# Altium PCB Rambo_Panel.PcbDoc
Units mil, origin at the board's own origin, x right, y up, seen from the top; angles counter-clockwise.
Board outline 4606.1 x 8609.74 mil, 4 copper layers (Top, GND, Supply, Bottom), stack 59.2 mil thick; 8 components, 0 nets, 12 pads, 0 vias.
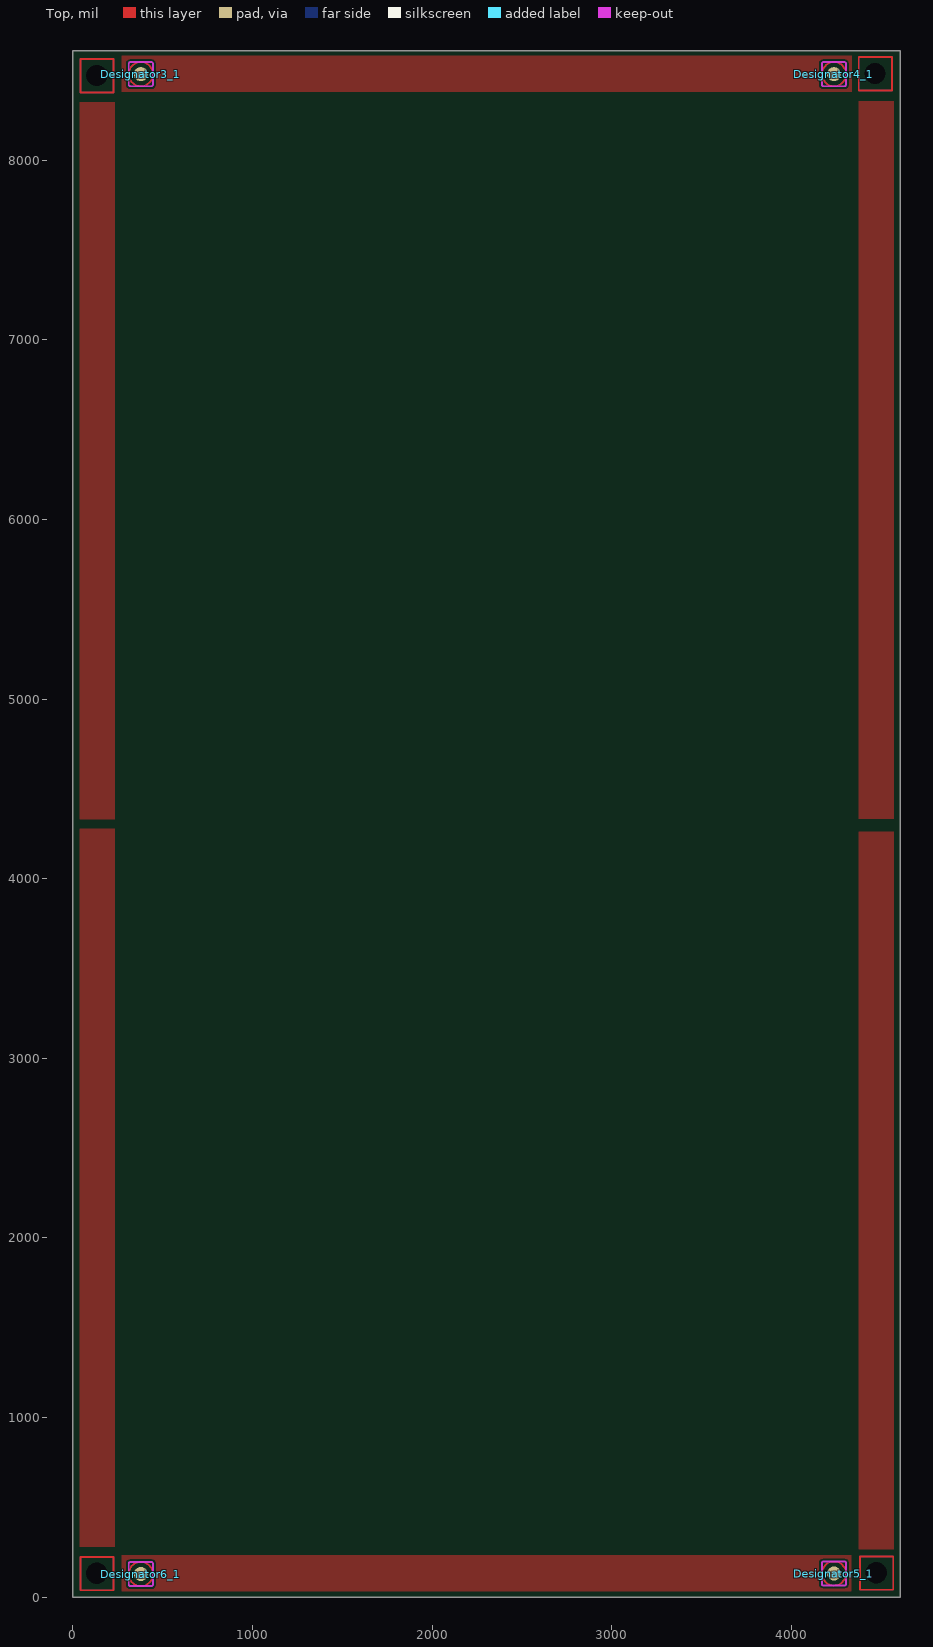
[diagram p0: Top view]
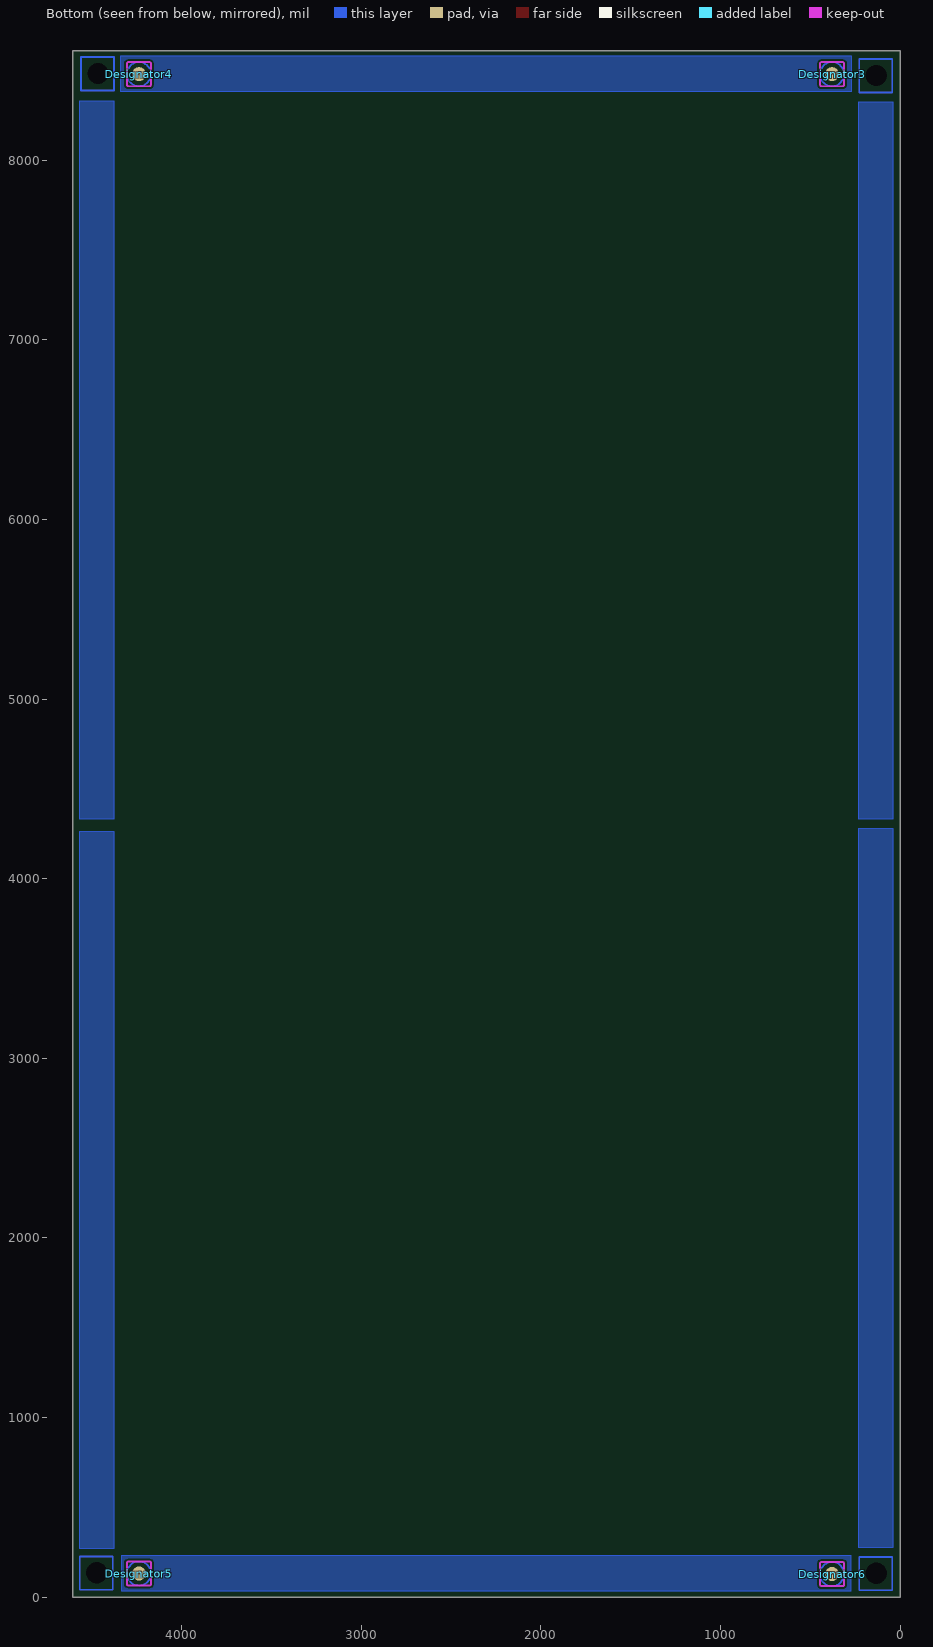
[diagram p1: Bottom view, seen from below]
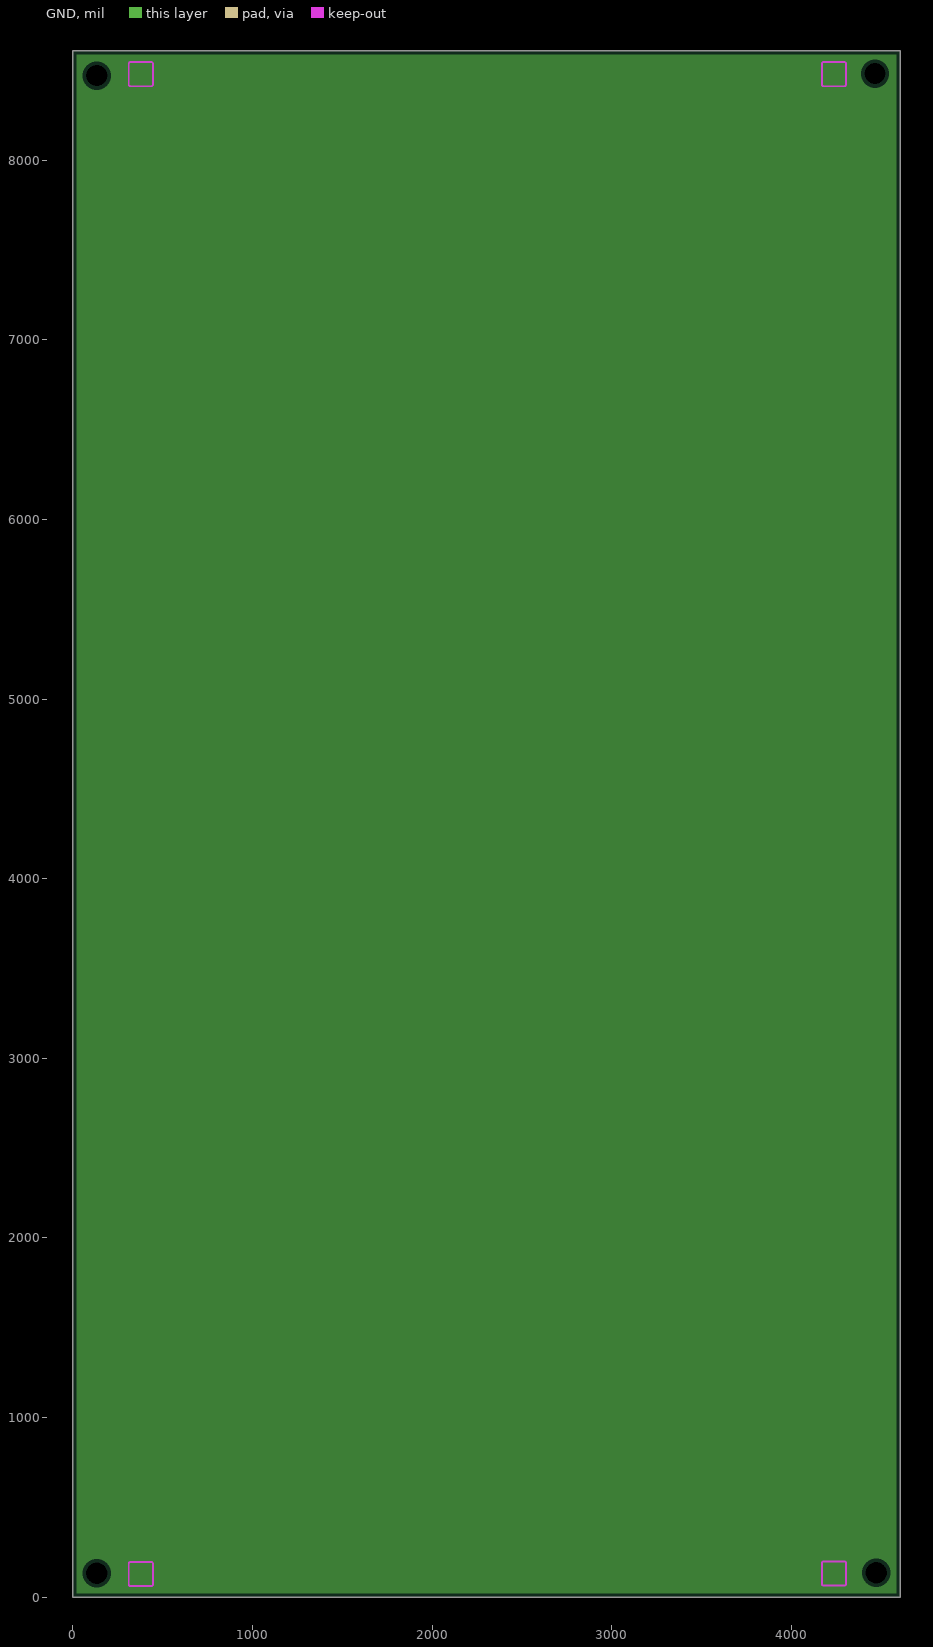
[diagram p2: GND, clearances drawn from the general rule]
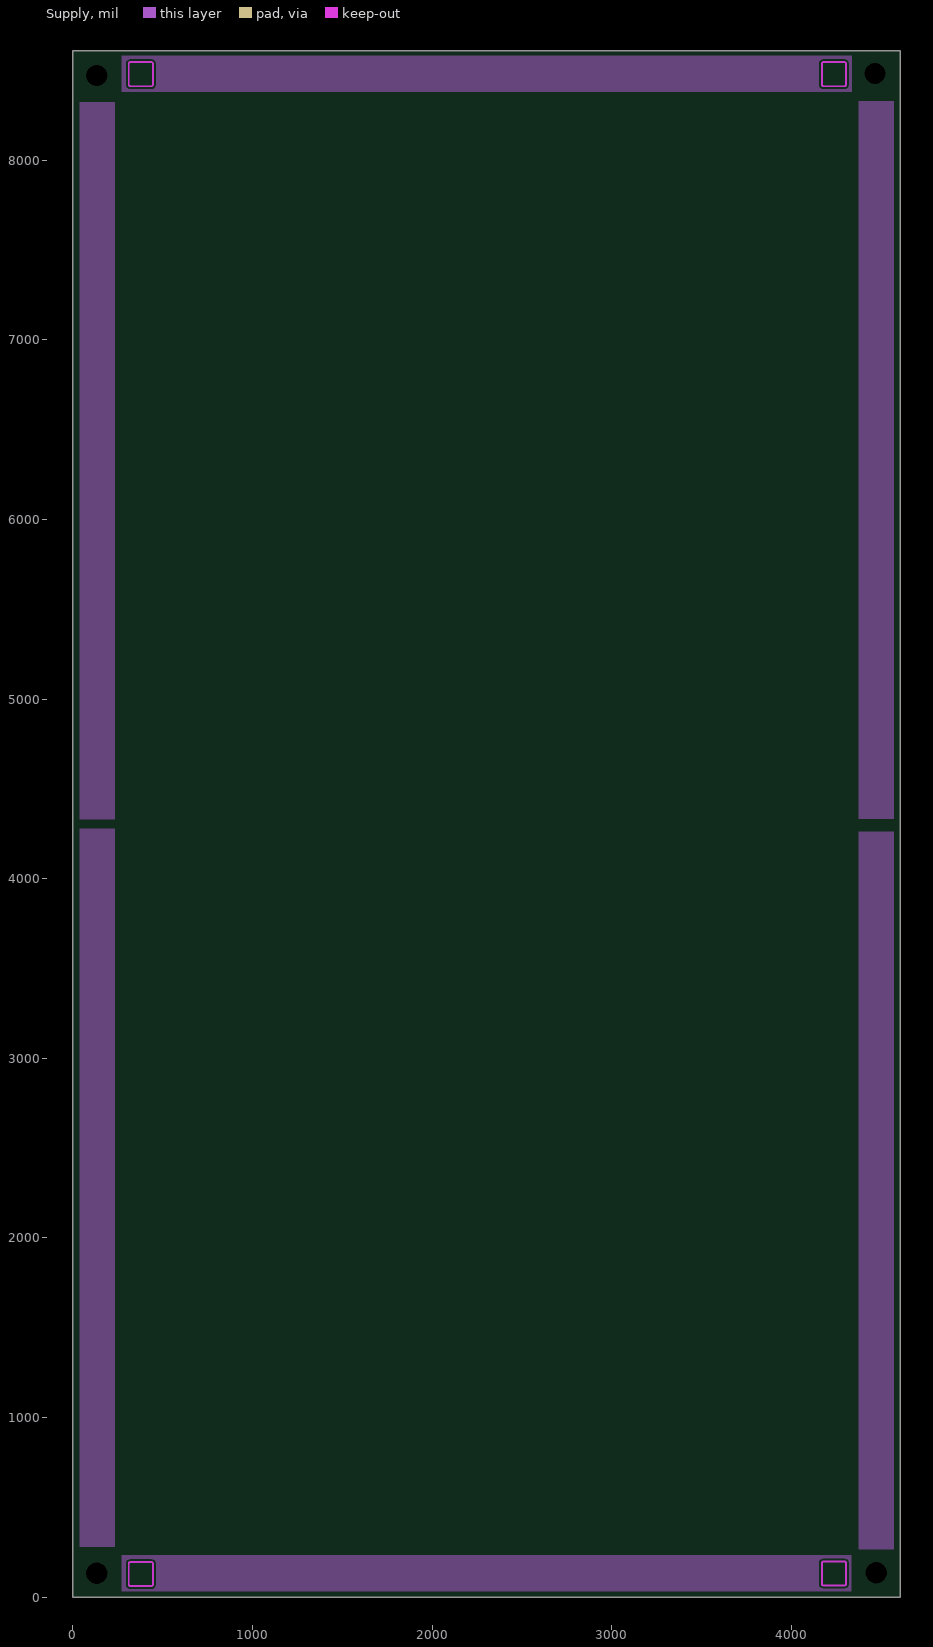
[diagram p3: Supply]

## Layer stack, top to bottom
Top Solder: solder mask 0.4, Solder Resist, Dk 3.5
Top: signal copper 2.8
Dielectric 1: prepreg 5.4, FR-4, Dk 4.2
GND: plane copper 1.4
Dielectric 2: core 40, FR-4, Dk 4.2
Supply: signal copper 1.4
Dielectric 3: prepreg 5.4, FR-4, Dk 4.2
Bottom: signal copper 2.8
Bottom Solder: solder mask 0.4, Solder Resist, Dk 3.5

## Board outline
0,0 0,8609.74 4606.1,8609.74 4606.1,0

## Design rules (kind name [scope] priority, off if disabled: settings)
Clearance [All] p1: gap=10 ignorepadtopadclearanceinfootprint=FALSE except(0: Arc-Hole Track-Hole SMDPad-Hole THPad-Hole Via-Hole Fill-Hole Poly-Hole Region-Hole Text-Hole)
HoleSize [All] p1: absolutevalues=TRUE maxlimit=120 minlimit=1 maxpercent=80.000 minpercent=20.000
PlaneClearance [All] p1: clearance=20
PlaneConnect [All] p1: planeconnectstyle=Relief reliefexpansion=20 reliefentries=4 reliefconductorwidth=10 reliefairgap=10
PolygonConnect [All] p1: connectstyle=Relief reliefconductorwidth=10 reliefentries=4 polygonreliefangle="90 Angle" airgapwidth=10
RoutingVias [All] p1: holewidth=28 width=50 viastyle="Through Hole" minholewidth=28 minwidth=50 maxholewidth=28 maxwidth=50
SolderMaskExpansion [All] p1: expansion=4
Width [All] p1: maxlimit=10 minlimit=7 preferedwidth=10 midlayer1_minwidth=10 minimp=50.000000 maximp=50.000000 favimp=50.000000
27 further rules are at their usual default settings.

## Components (designator, comment, footprint, x,y, rotation, side; value= is the part's Value field where it differs from the comment)
Designator3 "Comment" FIDUCIAL-2X3-PANEL 378.94,8479.74 r90 bottom
Designator3_1 "Comment" FIDUCIAL-2X3-PANEL 378.94,8479.74 r90 top
Designator4 "Comment" FIDUCIAL-2X3-PANEL 4237.8,8479.74 r90 bottom
Designator4_1 "Comment" FIDUCIAL-2X3-PANEL 4237.8,8479.74 r90 top
Designator5 "Comment" FIDUCIAL-2X3-PANEL 4237.8,131.89 r90 bottom
Designator5_1 "Comment" FIDUCIAL-2X3-PANEL 4237.8,131.89 r90 top
Designator6 "Comment" FIDUCIAL-2X3-PANEL 378.94,128.94 r90 bottom
Designator6_1 "Comment" FIDUCIAL-2X3-PANEL 378.94,128.94 r90 top

## Footprints (in the part's own frame and the unit in brackets; to place one, negate y for a bottom-side part, rotate by r counter-clockwise, add the part's x,y. Pads: shape width x height; smd on the part's side, far side on the other; paste and mask are expansions set on the pad)
FIDUCIAL-2X3-PANEL [mm]
  rrect100% 2x2 smd paste+0 mask+0.508: 1(0,0)
  Top circle w0.178: c0,0 r1.7
  Keep-Out Layer region: -1.5,-1.7 -1.577,-1.685 -1.641,-1.641 -1.685,-1.577 -1.7,-1.5 -1.7,-1.5 -1.7,1.5 -1.685,1.577 -1.641,1.641 -1.577,1.685 -1.5,1.7 -1.5,1.7 1.5,1.7 1.577,1.685 1.641,1.641 1.685,1.577 1.7,1.5 1.7,1.5 1.7,-1.5 1.685,-1.577 1.641,-1.641 1.577,-1.685 1.5,-1.7 1.5,-1.7
  Keep-Out Layer lines w0.254: -1.5,-1.7 cw(c-1.5,-1.5) -1.7,-1.5 -1.7,1.5 cw(c-1.5,1.5) -1.5,1.7 1.5,1.7 cw(c1.5,1.5) 1.7,1.5 1.7,-1.5 cw(c1.5,-1.5) 1.5,-1.7 -1.5,-1.7
  body extent -1.02,-1.02 1.02,1.02, height 0.02

## Free pads (board coordinates)
  round 0 hole 118.11 unplated paste-3897.64 mask-4.02: 0(132.87,132.87) 1(4473.19,135.83) 2(4466.1,8482.83) 3(132.87,8471.75)

## Nets (pads, with @x,y where several pads share a name; then routed paths per layer and width w, separated by ;. In a path a pad name is that pad's centre, name@x,y a point inside that pad or via, vN(x,y) a via of type N, cw(c..) or ccw(c..) an arc to the next point about the centre after c; other vN are vias at no path point)
pads on no net: Designator3.1 Designator3_1.1 Designator4.1 Designator4_1.1 Designator5.1 Designator5_1.1 Designator6.1 Designator6_1.1
copper on no net: | length 5922.1
  Top w10: 43.31,38.39 227.36,38.39 227.36,224.41 43.31,224.41 43.31,38.39 ; 43.31,8377.26 43.31,8563.28 227.36,8563.28 227.36,8377.26 43.31,8377.26 ; 4376.1,8388.35 4560.59,8388.35 4560.59,8574.37 4376.1,8574.37 4376.1,8388.35 ; 4383.62,41.34 4567.68,41.34 4567.68,227.36 4383.62,227.36 4383.62,41.34
  Bottom w10: 43.31,38.39 227.36,38.39 227.36,224.41 43.31,224.41 43.31,38.39 ; 43.31,8377.26 227.36,8377.26 227.36,8563.28 43.31,8563.28 43.31,8377.26 ; 4376.53,8388.35 4560.59,8388.35 4560.59,8574.37 4376.53,8574.37 4376.53,8388.35 ; 4383.62,41.34 4383.62,227.36 4567.68,227.36 4567.68,41.34 4383.62,41.34

## Polygon pours and split planes (outlines as drawn)
no net on Top "Frame-Copper" (solid, pour order 61): 4570,8327.83 4570,4332.83 4376.1,4332.83 4376.1,8327.83
no net on Top "Frame-Copper" (solid, pour order 59): 4570,4262.83 4570,267.83 4376.1,267.83 4376.1,4262.83
no net on Top "Frame-Copper" (solid, pour order 57): 232.83,4277.83 232.83,279.56 38.94,279.56 38.94,4277.83
no net on Top "Frame-Copper" (solid, pour order 55): 271.36,8382.44 4337.83,8382.44 4337.83,8582.24 271.36,8582.24
no net on Top "Frame-Copper" (solid, pour order 53): 273.62,33.46 4332.83,33.46 4332.83,233.27 273.62,233.27
no net on Top "Frame-Copper" (solid, pour order 51): 232.78,8322.83 232.78,4331.83 38.89,4331.83 38.89,8322.83
no net on Bottom "Frame-Copper" (solid, pour order 97): 273.62,33.46 4332.83,33.46 4332.83,233.27 273.62,233.27
no net on Bottom "Frame-Copper" (solid, pour order 95): 232.83,4277.83 232.83,277.56 38.94,277.56 38.94,4277.83
no net on Bottom "Frame-Copper" (solid, pour order 93): 232.83,8322.83 232.83,4332.83 38.94,4332.83 38.94,8322.83
no net on Bottom "Frame-Copper" (solid, pour order 91): 271.21,8381.5 4337.83,8381.5 4337.83,8581.3 271.21,8581.3
no net on Bottom "Frame-Copper" (solid, pour order 89): 4570,8327.83 4570,4332.83 4376.1,4332.83 4376.1,8327.83
no net on Bottom "Frame-Copper" (solid, pour order 87): 4570,4262.83 4570,271.83 4376.1,271.83 4376.1,4262.83
no net on Bottom "Frame-Copper" (solid, pour order 73): 4570,4262.83 4570,271.83 4376.1,271.83 4376.1,4262.83
no net on Bottom "Frame-Copper" (solid, pour order 71): 4570,8327.83 4570,4332.83 4376.1,4332.83 4376.1,8327.83
no net on Bottom "Frame-Copper" (solid, pour order 69): 271.21,8381.5 4337.83,8381.5 4337.83,8581.3 271.21,8581.3
no net on Bottom "Frame-Copper" (solid, pour order 67): 232.83,8322.83 232.83,4332.83 38.94,4332.83 38.94,8322.83
no net on Bottom "Frame-Copper" (solid, pour order 65): 232.83,4277.83 232.83,277.56 38.94,277.56 38.94,4277.83
no net on Bottom "Frame-Copper" (solid, pour order 63): 273.62,33.46 4332.83,33.46 4332.83,233.27 273.62,233.27
no net on Supply "Frame-Copper" (solid, pour order 109): 232.78,8322.83 232.78,4331.83 38.89,4331.83 38.89,8322.83
no net on Supply "Frame-Copper" (solid, pour order 107): 273.62,33.46 4332.83,33.46 4332.83,233.27 273.62,233.27
no net on Supply "Frame-Copper" (solid, pour order 105): 271.36,8382.44 4337.83,8382.44 4337.83,8582.24 271.36,8582.24
no net on Supply "Frame-Copper" (solid, pour order 103): 232.83,4277.83 232.83,279.56 38.94,279.56 38.94,4277.83
no net on Supply "Frame-Copper" (solid, pour order 101): 4570,4262.83 4570,267.83 4376.1,267.83 4376.1,4262.83
no net on Supply "Frame-Copper" (solid, pour order 99): 4570,8327.83 4570,4332.83 4376.1,4332.83 4376.1,8327.83
no net on GND (split plane): 4586,20.1 20.1,20.1 20.1,8589.64 4586,8589.64

## Other copper
Top:
  text "Top Layer" at 148.69,9323.4 h75
  text "Layer 1" at 173.69,9198.4 h75
  text "Rambo_Panel_1.4a" at 173.69,9073.4 h75
Supply:
  text "Mid Signal" at 1418.69,9318.4 h75
  text "Layer 2" at 1418.69,9193.4 h75
  text "Rambo_Panel_1.4a" at 1418.69,9068.4 h75
Bottom:
  text "Bot Signal" at 3493.69,9318.4 h75
  text "Layer 4" at 3493.69,9193.4 h75
  text "Rambo_Panel_1.4a" at 3493.69,9068.4 h75
GND (plane layer: these items are gaps in the copper):
  text "B GND Plane" at 2643.69,9318.4 h75
  text "Layer 3" at 2643.69,9193.4 h75
  text "Rambo_Panel_1.4a" at 2643.69,9068.4 h75

## Silkscreen, mask and mechanical layers (free items; w line width, h text height)
Top Overlay:
  text "Top Silkscreen" at 1398.69,9573.4 h75
  text "Rambo_Panel_1.4a" at 1398.69,9448.4 h75
Bottom Overlay:
  text "Bot Silkscreen" at 2723.69,9573.4 h75
  text "Rambo_Panel_1.4a" at 2723.69,9448.4 h75
Top Paste:
  text "Top Paste" at 3998.69,9573.4 h75
  text "Rambo_Panel_1.4a" at 3998.69,9448.4 h75
Top Solder:
  text "Top Soldermask" at 5273.69,9573.4 h75
  text "Rambo_Panel_1.4a" at 5273.69,9448.4 h75
Bottom Solder:
  text "Bot Soldermask" at 148.69,9823.4 h75
  text "Rambo_Panel_1.4a" at 148.69,9698.4 h75
Drill Guide:
  text "Drill Guide" at 4148.69,9823.4 h75
  text "Rambo_Panel_1.4a" at 4148.69,9698.4 h75
Mechanical 2:
  drawing of 295 lines, arcs and shapes, not listed
  text "NOTES (UNLESS SPECIFIED OTHERWISE)" at 5499.41,8454.41 h80
  text "1. FABRICATE PCB IN ACCORDANCE WITH IPC-A-600 CLASS 2 (LATEST REVISION)" at 5597.83,8159.13 h80
  text "2. THE PCB MUST BE LEAD FREE ASSEMBLY PROCESS COMPATIBLE." at 5597.83,7863.86 h80
  text "MUST HANDLE MINIMUM 6 CYCLES - 260C FOR 10 SECONDS." at 5792.83,7707.83 h80
  text "3. LAMINATE AND PREPREG TO BE FR4 TG170" at 5597.83,7470.16 h80
  text "4. PLATING FINISH - BOTH SIDES ENIG GOLD PLATED" at 5597.83,7174.88 h80
  text "5. SOLDERMASK - BOTH SIDES GREEN" at 5597.83,6879.61 h80
  text "6. SOLDER SAMPLES TO BE PROVIDED" at 5597.83,6584.33 h80
  text "7. FINISHED PCB MUST BE MANELIZED FOR ASSEMBLY." at 5597.83,6289.06 h80
  text "8. SILKSCREEN - WHITE EPOXY INK, BOTH SIDES. NO SILK ON PADS" at 5597.83,6003.23 h80
  text "9. SUPPLIER MARKING - ON SOLDER SIDE" at 5597.83,5707.95 h80
  text "ADD ROHS LOGO" at 5794.69,5511.1 h80
  text "ADD UL MARKING AND ID" at 5794.69,5314.25 h80
  text "10. LAYER STACKUP - SEE DETAIL A" at 5597.83,5018.98 h80
  text "DETAIL A" at 5700,4260 h90
  text "File" at 5685.01,4045 h60
  text "Layer" at 6040,4045 h60
  text "Name" at 6449.91,4045 h60
  text "Material" at 7379.66,4045 h60
  text "Thickness" at 8239.42,4045 h60
  text "Constant" at 8889.26,4045 h60
  text "Board Layer Stack" at 9459.12,4045 h60
  text "GTO" at 5725,3925 h60
  text "1" at 6040,3925 h60
  text "Top Overlay" at 6449.91,3925 h60
  text "GTS" at 5725,3805 h60
  text "2" at 6040,3805 h60
  text "Top Solder" at 6449.91,3805 h60
  text "Solder Resist" at 7379.66,3805 h60
  text "0.40mil" at 8239.42,3805 h60
  text "3.5" at 8889.26,3805 h60
  text "GTL" at 5725,3685 h60
  text "3" at 6040,3685 h60
  text "Top" at 6449.91,3685 h60
  text "Copper" at 7379.66,3685 h60
  text "2.80mil" at 8239.42,3685 h60
  text "4" at 6040,3565 h60
  text "Dielectric 1" at 6449.91,3565 h60
  text "FR-4" at 7379.66,3565 h60
  text "5.40mil" at 8239.42,3565 h60
  text "4.2" at 8889.26,3565 h60
  text "GP1" at 5744.99,3450 h60
  text "5" at 6040,3445 h60
  text "GND" at 6449.91,3445 h60
  text "Copper" at 7379.66,3445 h60
  text "1.40mil" at 8239.42,3445 h60
  text "6" at 6040,3325 h60
  text "Dielectric 2" at 6449.91,3325 h60
  text "FR-4" at 7379.66,3325 h60
  text "40.00mil" at 8239.42,3325 h60
  text "4.2" at 8889.26,3325 h60
  text "G1" at 5804.97,3205 h60
  text "7" at 6040,3205 h60
  text "Supply" at 6449.91,3205 h60
  text "Copper" at 7379.66,3205 h60
  text "1.40mil" at 8239.42,3205 h60
  text "8" at 6040,3085 h60
  text "Dielectric 3" at 6449.91,3085 h60
  text "FR-4" at 7379.66,3085 h60
  text "5.40mil" at 8239.42,3085 h60
  text "4.2" at 8889.26,3085 h60
  text "9" at 6040,2965 h60
  text "Bottom" at 6449.91,2965 h60
  text "Copper" at 7379.66,2965 h60
  text "2.80mil" at 8239.42,2965 h60
  text "GBL" at 5725,2957.83 h60
  text "10" at 6040,2845 h60
  text "Bottom Solder" at 6449.91,2845 h60
  text "Solder Resist" at 7379.66,2845 h60
  text "0.40mil" at 8239.42,2845 h60
  text "3.5" at 8889.26,2845 h60
  text "GBS" at 5725,2842.83 h60
  text "GBO" at 5725,2727.83 h60
  text "11" at 6040,2725 h60
  text "Bottom Overlay" at 6449.91,2725 h60
Mechanical 3:
  text "Board Outline" at 148.69,9573.4 h75
  text "Rambo_Panel_1.4a" at 148.69,9448.4 h75
Mechanical 9:
  text "Board Dimensions" at 2723.69,9823.4 h75
  text "Rambo_Panel_1.4a" at 2723.69,9698.4 h75
Drill Drawing:
  lines w15: 5948.54,-363.33 9827.51,-363.33 ; 5948.54,-213.33 9827.51,-213.33 ; 6499.42,-513.33 6499.42,-63.33 ; 7197.23,-513.33 7197.23,-63.33 ; 8542.84,-513.33 8542.84,-63.33 ; 9048.71,-513.33 9048.71,-63.33 ; 5948.54,-513.33 9827.51,-513.33 9827.51,-63.33 5948.54,-63.33 5948.54,-513.33
  text "Drill Drawing" at 1498.69,9823.4 h75
  text "Rambo_Panel_1.4a" at 1498.69,9698.4 h75
  text "Symbol" at 6038.54,-168.33 h72
  text "Hit Count" at 6544.42,-168.33 h72
  text "Finished Hole Size" at 7242.23,-168.33 h72
  text "Plated" at 8587.84,-168.33 h72
  text "Hole Type" at 9093.71,-168.33 h72
  text "4" at 6544.42,-318.33 h60
  text "3.000mm (118.11mil)" at 7242.23,-318.33 h60
  text "NPTH" at 8587.84,-318.33 h60
  text "Round" at 9093.71,-318.33 h60
  text "A" at 6009.45,-328.32 h66.67
  text "4 Total" at 6544.42,-468.33 h60
Panel Dimension:
  the board outline again, w10
V-Score:
  lines w10: -4.17,4303.94 4613.83,4303.94 ; 0,253.94 4608.86,253.94 ; 6.95,8353.94 4612.86,8353.94 ; 253.94,3.94 253.94,8612.83 ; 4353.94,0 4353.94,8607.83

## Dimensions
0,0 to 4606.1,0 on Mechanical 2
4606.1,0 to 4606.1,8609.74 on Mechanical 2

## Panel: embedded boards
"..\RAMBo.PcbDoc" at 253.94,253.94, 2 rows x 1 columns, spacing 4050 x 4100, rotation 0